# Altium PCB Tien.PcbDoc
Units mm, origin at the board's own origin, x right, y up, seen from the top; angles counter-clockwise.
Board outline 76.58 x 90.04 mm, 2 copper layers (Top Layer, Bottom Layer); 47 components, 70 nets, 267 pads, 0 vias.
Unrouted connection lines stored in the file: 2.
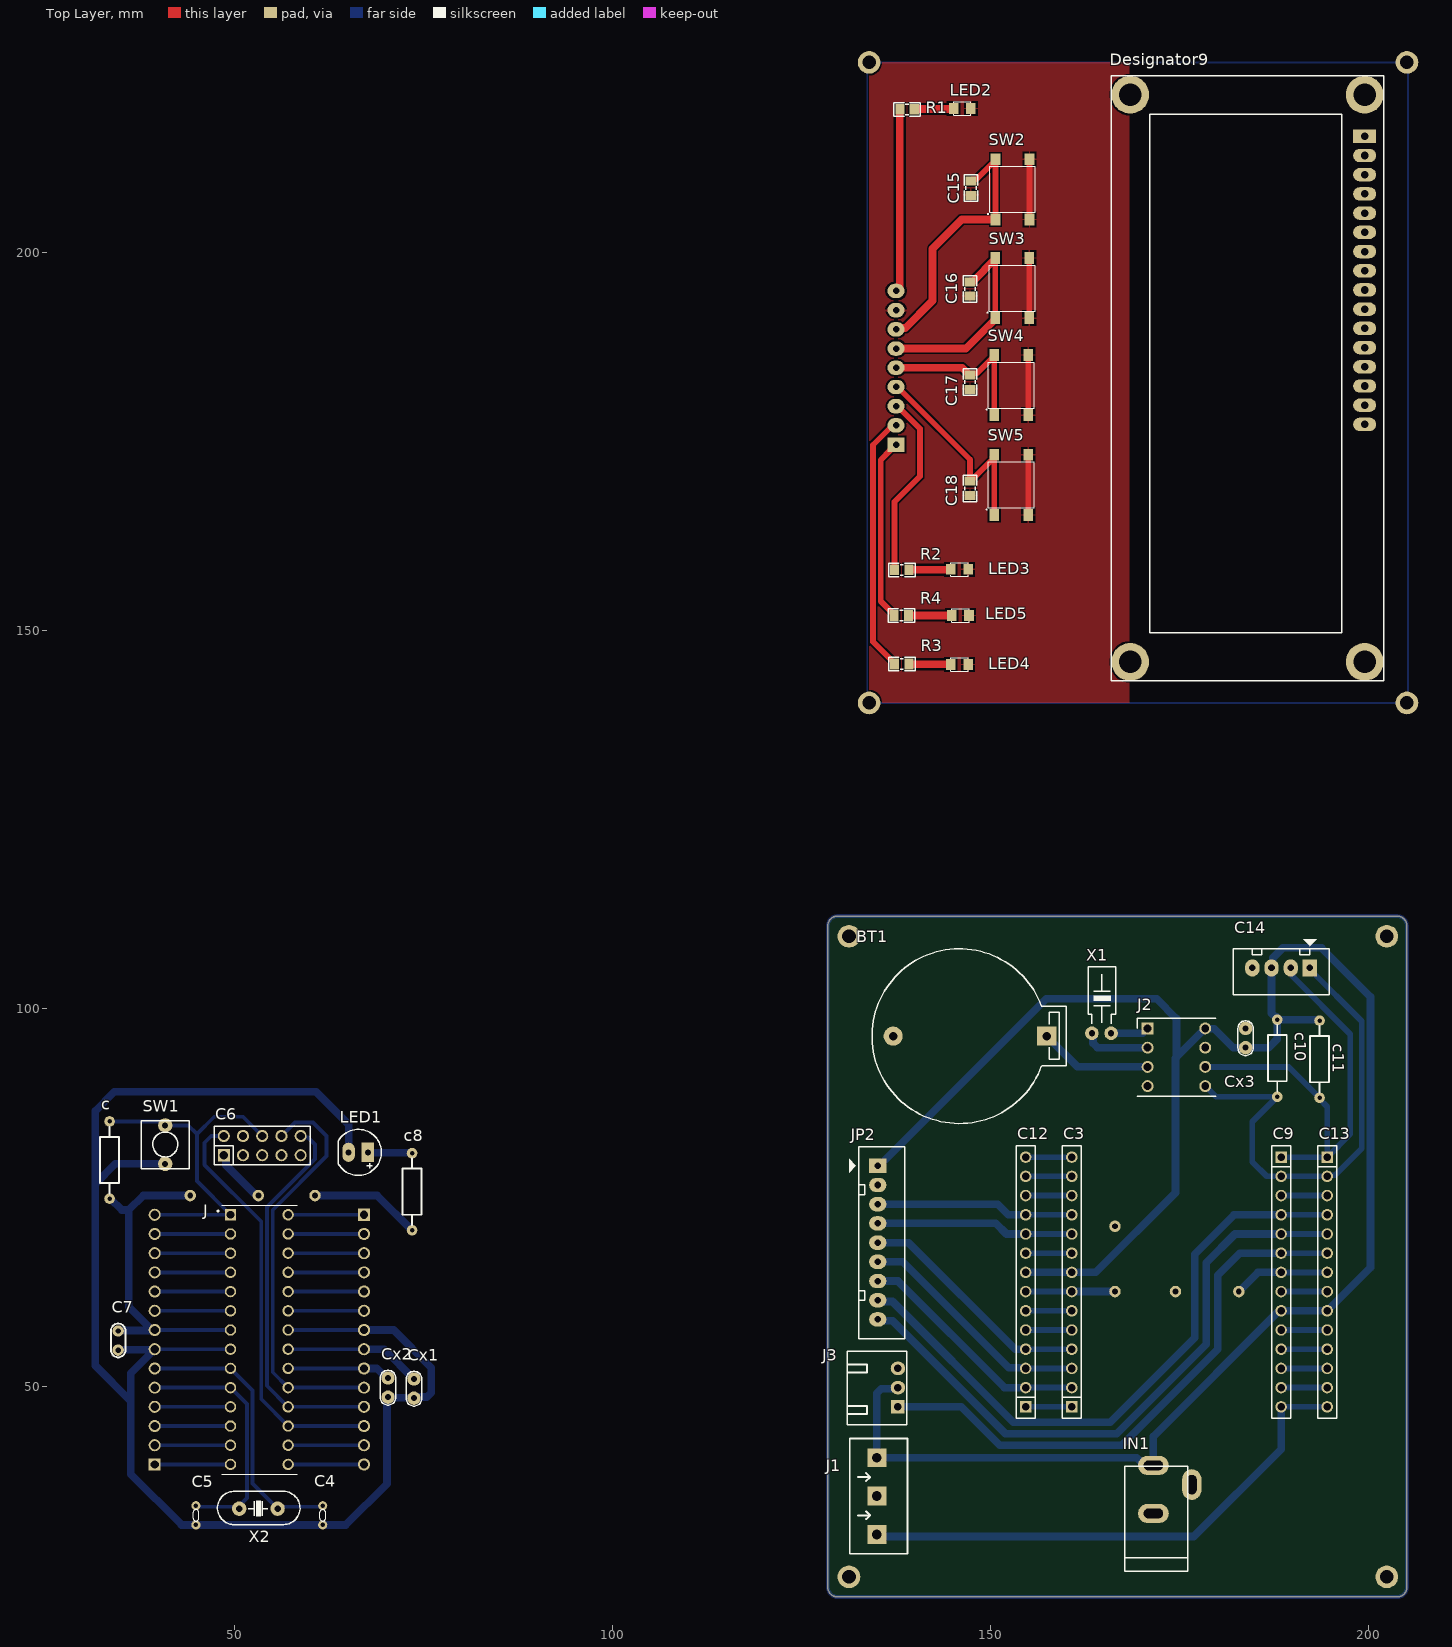
[diagram p0: Top Layer view]
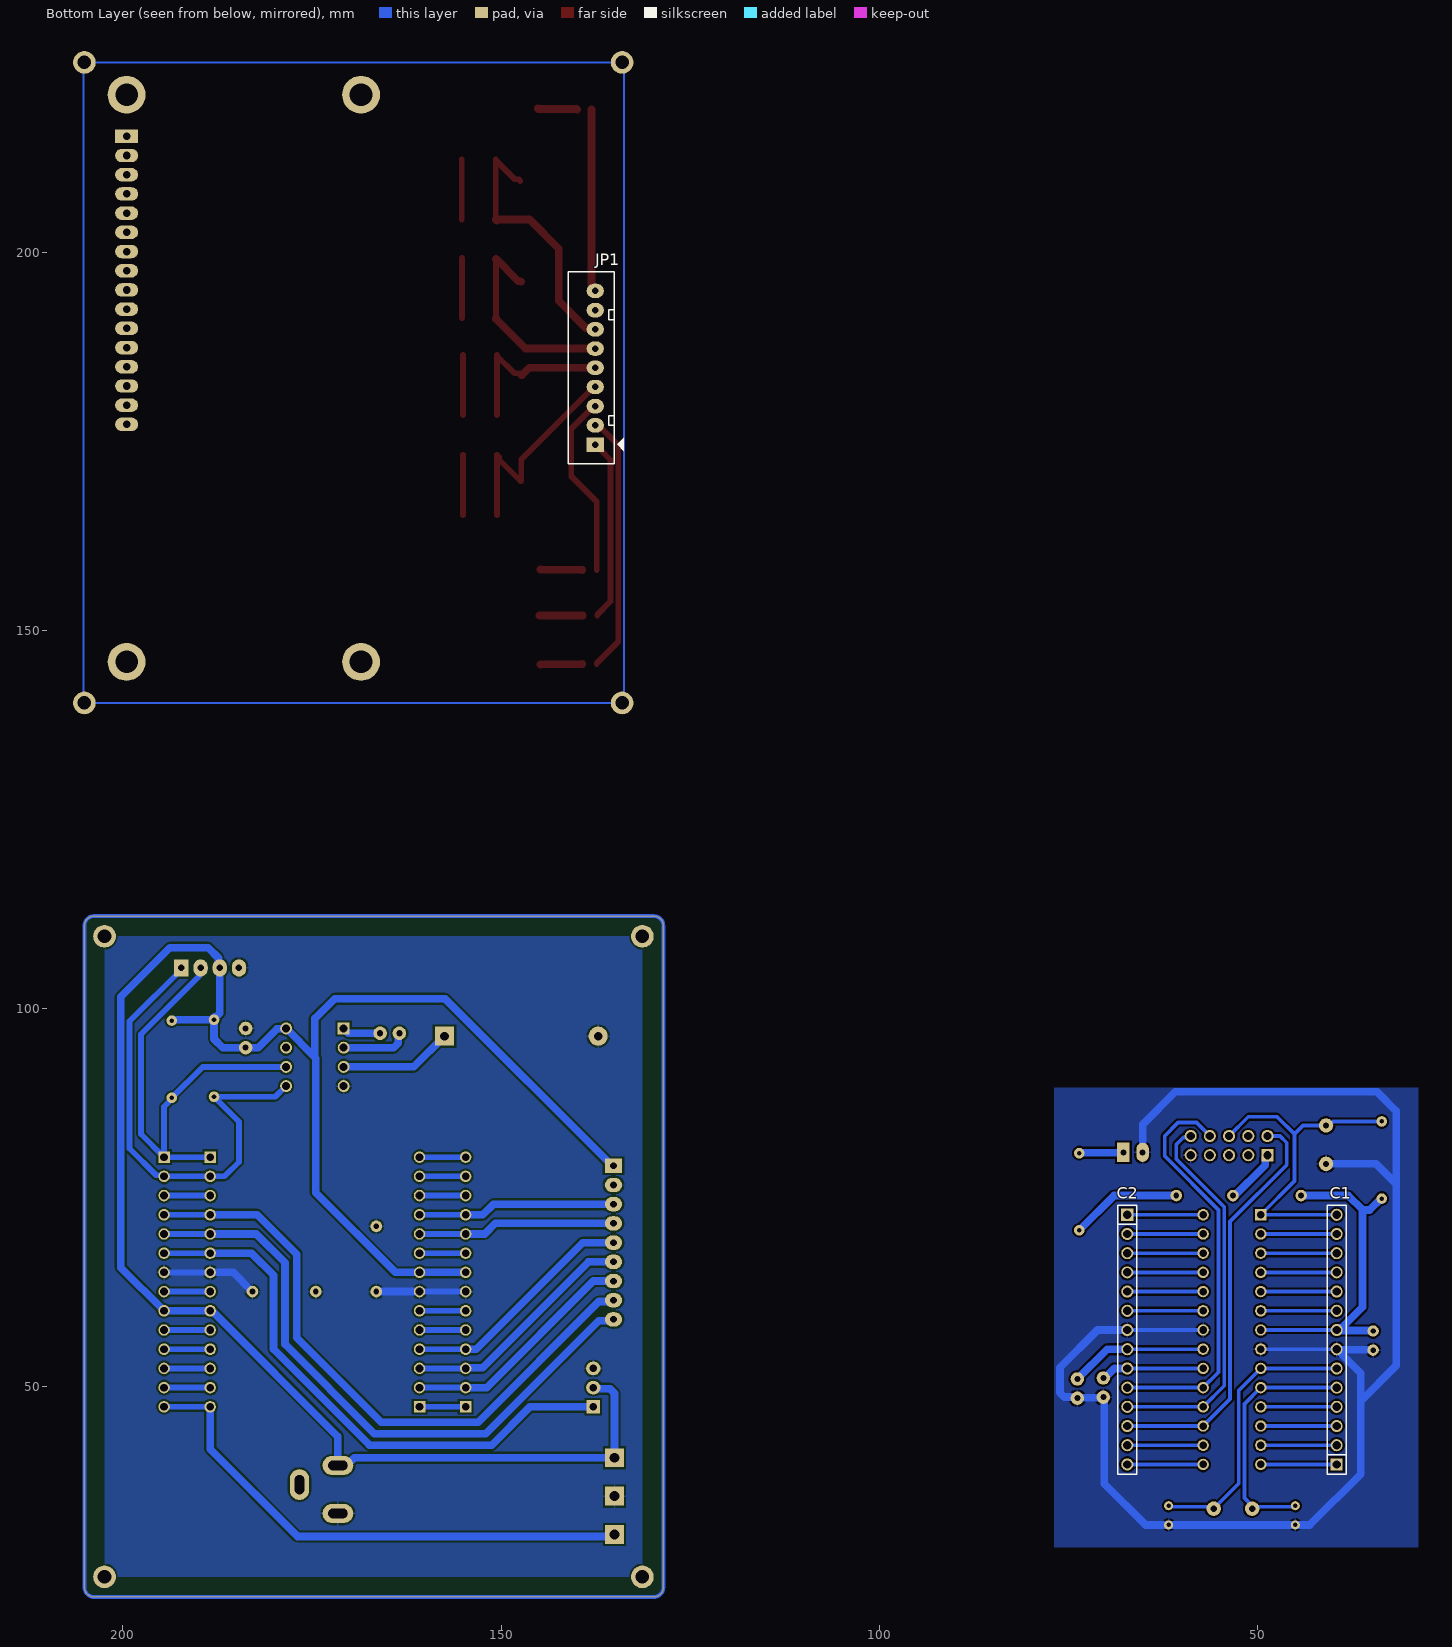
[diagram p1: Bottom Layer view, seen from below]

## Layer stack, top to bottom
Top Solder: solder mask 0.0102, Solder Resist, Dk 3.5
Top Layer: signal copper 0.0356
Dielectric 1: dielectric 0.32, FR-4, Dk 4.8
Bottom Layer: signal copper 0.0356
Bottom Solder: solder mask 0.0102, Solder Resist, Dk 3.5

## Board outline
128.524,23.495 ccw(c129.794,23.495) 129.794,22.225 203.835,22.225 ccw(c203.835,23.495) 205.105,23.495 205.105,110.998 ccw(c203.835,110.998) 203.835,112.268 129.794,112.268 ccw(c129.794,110.998) 128.524,110.998

## Design rules (kind name [scope] priority, off if disabled: settings)
Clearance [All] p1: gap=0.254 ignorepadtopadclearanceinfootprint=FALSE except(0: Arc-Hole Track-Hole SMDPad-Hole THPad-Hole Via-Hole Fill-Hole Poly-Hole Region-Hole Text-Hole)
PolygonConnect [All] p1: connectstyle=Relief reliefconductorwidth=0.254 reliefentries=4 polygonreliefangle="90 Angle" airgapwidth=0.254
RoutingVias [All] p1: holewidth=0.711 width=1.27 viastyle="Through Hole" minholewidth=0.711 minwidth=1.27 maxholewidth=0.711 maxwidth=1.27
SolderMaskExpansion [All] p1: expansion=0.102 istentingtop=FALSE
Width [All] p1: maxlimit=1.016 minlimit=0.508 preferedwidth=0.762 minimp=50.000000 maximp=50.000000 favimp=50.000000
30 further rules are at their usual default settings.

## Components (designator, comment, footprint, x,y, rotation, side; value= is the part's Value field where it differs from the comment)
BT1 "PIN 3V" PIN3V 157.48,96.393 r180 top
c "100K" "tro vach 1/4w" 33.528,80.01 r270 top
C1 "JP14" JP14-D1T 39.497,39.751 r90 bottom
C2 "JP14" JP14-D1T 67.183,72.771 r270 bottom
C3 "JP14" JP14-C1T 160.782,47.371 r90 top
C4 "MH" Tu-pico 61.722,34.29 r270 top value=33p
C5 "MH" Tu-pico 44.958,34.29 r270 top value=33p
C6 "JP5x2" JP5-D2T 53.721,81.915 r0 top
C7 "104" "tu gom" 34.671,56.134 r270 top
c8 "1K" "tro vach 1/4w" 73.533,75.819 r270 top
C9 "JP14" JP14-C1T 188.468,80.391 r270 top
c10 "4,7K" "tro vach 1/4w" 187.96,93.472 r90 top
c11 "4,7K" "tro vach 1/4w" 193.548,93.345 r90 top
C12 "JP14" JP14-C1T 154.686,47.371 r90 top
C13 "JP14" JP14-C1T 194.564,80.391 r270 top
C14 "Header4" Header4 192.278,105.41 r180 top
C15 "106" "Tu 0805" 147.447,208.534 r90 top
C16 "106" "Tu 0805" 147.32,195.199 r90 top
C17 "106" "Tu 0805" 147.32,182.88 r90 top
C18 "106" "Tu 0805" 147.317,168.84 r90 top
Cx1 "104" CN1 73.787,49.784 r270 top value=33pF
Cx2 "104" CN1 70.358,49.911 r270 top value=33pF
Cx3 "104" CN1 183.769,96.139 r270 top value=33pF
Designator9 "Comment" LCD16X2 199.517,215.392 r270 top
IN1 "Jac DC" DC0 174.117,36.449 r90 top
J "1-2199298-9" DIP762W60P254L3556H510Q28 53.34,56.261 r0 top
J1 "KF3" KF3-5.08 135.001,40.64 r270 top
J2 "A_08-LC-TT" DIPS762W61P254L1016H525Q8N 170.815,97.409 r0 top
J3 "sensor header" "Header_Duc Cong_3P 2.54" 137.795,47.371 r270 top
JP1 "JP9" Header9 137.541,174.625 r90 bottom value="Connector 9"
JP2 "JP9" Header9 135.128,79.248 r270 top value="Connector 9"
LED1 "LED" LED-5-RED 67.691,81.026 r180 top value="LED 3 ly Single Colour"
LED2 "LED" LED-0805-Red 145.161,219.075 r0 top value="LED 3 - 5 ly 2 Colour"
LED3 "LED" LED-0805-Red 144.78,158.115 r0 top value="LED 3 - 5 ly 2 Colour"
LED4 "LED" LED-0805-Red 144.78,145.542 r0 top value="LED 3 - 5 ly 2 Colour"
LED5 "LED" LED-0805-Red 144.907,152.019 r0 top value="LED 3 - 5 ly 2 Colour"
R1 "330R" "Tro SMD 0805" 139.003,218.887 r180 top
R2 "330R" "Tro SMD 0805" 138.303,157.988 r180 top
R3 "330R" "Tro SMD 0805" 138.303,145.542 r180 top
R4 "330R" "Tro SMD 0805" 138.246,151.958 r180 top
SW1 "" SW2 40.894,84.582 r270 top
SW2 "SW" SW2-SMD 152.944,208.369 r90 top value="Button chip 4 pin"
SW3 "SW" SW2-SMD 152.908,195.326 r90 top value="Button chip 4 pin"
SW4 "SW" SW2-SMD 152.781,182.499 r90 top value="Button chip 4 pin"
SW5 "SW" SW2-SMD 152.781,169.291 r90 top value="Button chip 4 pin"
X1 "32k" XT32k 163.449,96.774 r90 top value=4Mhz
X2 "16Mhz" XT2 53.213,33.909 r0 top value=4Mhz

## Footprints (in the part's own frame and the unit in brackets; to place one, negate y for a bottom-side part, rotate by r counter-clockwise, add the part's x,y. Pads: shape width x height; smd on the part's side, far side on the other; paste and mask are expansions set on the pad)
CN1 [mil]
  round 70 hole 31: 1(-50,0) 2(50,0)
  silkscreen extent -90,-40 91,40, body extent -115,-33 115,33, height 265
DC0 [mil] "Jac DC input"
  oval 100x160 hole 50 slot 100 at 90 deg: 1(125,100) 2(-125,100)
  oval 160x100 hole 50 slot 100 at 0 deg: 3(25,-100)
  silkscreen extent -425,-80 120,250, body extent -410,-105 134,269, height 434
DIP762W60P254L3556H510Q28 [mm]
  rect 1.508x1.508 hole 1: 1(-3.81,16.51)
  round 1.508 hole 1: 2(-3.81,13.97) 3(-3.81,11.43) 4(-3.81,8.89) 5(-3.81,6.35) 6(-3.81,3.81) 7(-3.81,1.27) 8(-3.81,-1.27) 9(-3.81,-3.81) 10(-3.81,-6.35) 11(-3.81,-8.89) 12(-3.81,-11.43) 13(-3.81,-13.97) 14(-3.81,-16.51) 15(3.81,-16.51) 16(3.81,-13.97) 17(3.81,-11.43) 18(3.81,-8.89) 19(3.81,-6.35) 20(3.81,-3.81) 21(3.81,-1.27) 22(3.81,1.27) 23(3.81,3.81) 24(3.81,6.35) 25(3.81,8.89) 26(3.81,11.43) 27(3.81,13.97) 28(3.81,16.51)
  silkscreen extent -5.55,-17.78 5,17.78, body extent -4.87,-17.78 5.13,17.78, height 5
DIPS762W61P254L1016H525Q8N [mm]
  rect 1.575x1.575 hole 1.05: 1(0,0)
  round 1.575 hole 1.05: 2(0,-2.54) 3(0,-5.08) 4(0,-7.62) 5(7.62,-7.62) 6(7.62,-5.08) 7(7.62,-2.54) 8(7.62,0)
  silkscreen extent -1.37,-8.99 8.99,1.37, body extent -1.27,-8.76 8.89,1.4, height 4.81
Header4 [mil] "CON4"
  rect 75x90 hole 34: 1(0,0)
  oval 75x90 hole 34: 2(100,0) 3(200,0) 4(300,0)
  silkscreen extent -100,-150 400,140, body extent -90,-90 398,136, height 276
Header9 [mil] "CON9"
  rect 75x90 hole 34: 1(0,0)
  oval 75x90 hole 34: 2(100,0) 3(200,0) 4(300,0) 5(400,0) 6(500,0) 7(600,0) 8(700,0) 9(800,0)
  silkscreen extent -100,-150 900,140
"Header_Duc Cong_3P 2.54" [mil]
  rect 70x70 hole 39.37 unplated: 1(0,0)
  oval 70x75 hole 39.37 unplated: 2(-100,0) 3(-200,0)
  silkscreen extent -290,-265 93,47
JP5-D2T [mm] "10 pins, dual pin, straight, gold plating"
  rect 1.6x1.6 hole 1.1: 1(-5.08,-1.27)
  round 1.6 hole 1.1: 2(-2.54,-1.27) 3(0,-1.27) 4(2.54,-1.27) 5(5.08,-1.27) 6(5.08,1.27) 7(2.54,1.27) 8(0,1.27) 9(-2.54,1.27) 10(-5.08,1.27)
  silkscreen extent -6.35,-2.54 6.35,2.54, body extent -6.35,-2.54 6.35,2.54, height 8.55
JP14-C1T [mm] "14 row, straight, gold plating"
  rect 1.52x1.52 hole 1.02: 1(0,0)
  round 1.52 hole 1.02: 2(2.54,0) 3(5.08,0) 4(7.62,0) 5(10.16,0) 6(12.7,0) 7(15.24,0) 8(17.78,0) 9(20.32,0) 10(22.86,0) 11(25.4,0) 12(27.94,0) 13(30.48,0) 14(33.02,0)
  silkscreen extent -1.52,-1.27 34.54,1.27, body extent -1.52,-1.25 34.54,1.25, height 8.51
JP14-D1T [mm] "14 pins, 1 row, straight, gold plating"
  rect 1.6x1.6 hole 1.1: 1(0,0)
  round 1.6 hole 1.1: 2(2.54,0) 3(5.08,0) 4(7.62,0) 5(10.16,0) 6(12.7,0) 7(15.24,0) 8(17.78,0) 9(20.32,0) 10(22.86,0) 11(25.4,0) 12(27.94,0) 13(30.48,0) 14(33.02,0)
  silkscreen extent -1.27,-1.27 34.29,1.27, body extent -1.27,-1.27 34.29,1.27, height 8.54
KF3-5.08 [mm]
  rect 2.5x2.5 hole 1.3: 1(0,0) 2(5.08,0) 3(10.147,0)
  silkscreen extent -2.54,-3.58 12.7,4.06, body extent -2.42,-3.51 12.58,3.99, height 10
LCD16X2 [mm] "LCD dipslay 16x2, 16 pin"
  round 5 hole 3: 1(-5.5,0) 1(-5.5,-31) 1(69.5,-31) 1(69.5,0)
  rect 1.778x3.048 hole 1: 1(0,0)
  oval 1.778x3.048 hole 1: 2(2.54,0) 3(5.08,0) 4(7.62,0) 5(10.16,0) 6(12.7,0) 7(15.24,0) 8(17.78,0) 9(20.32,0) 10(22.86,0) 11(25.4,0) 12(27.94,0) 13(30.48,0) 14(33.02,0) 15(35.56,0) 16(38.1,0)
  round 0 all layers, no hole: ""(-5.5,0)
  silkscreen extent -8,-33.5 72,2.5, body extent -7.87,-33.96 72.64,2.54, height 18.14
LED-5-RED [mil] "LED 2 PIN, 5 ly , Only colour,pin to pin 100mil"
  rect 65x100 hole 32: 1(0,0)
  oval 65x100 hole 32: 2(100,0)
  silkscreen extent -70,-120 154,120, body extent -65,-119 149,118, height 339
LED-0805-Red [mil]
  rect 50x55 smd: 1(0,0) 2(90,0)
  silkscreen extent 0,-35 90,35, body extent 5,-25 85,25, height 43
PIN3V [mil] "Socket PIN 3V"
  rect 100x100 hole 45: 1(0,0)
  round 100 hole 45: 2(800,0)
  silkscreen extent -100,-455 910,455, body extent -128,-447 1002,449, height 278
SW2 [mil] "SW button 2pin, 250x 250 mil"
  round 75 hole 31: 1(0,0) 2(200,0)
  silkscreen extent -25,-125 225,125
SW2-SMD [mm] "6*6mm vertical type, SMD, height 5.0mm, black actuator, 160gf, T&R"
  rect 1.55x1.3 smd: 1(-3.975,2.25) 2(-3.975,-2.25) 3(3.975,-2.25) 4(3.975,2.25)
  silkscreen extent -3.29,-3.04 3.04,3.29, body extent -4.5,-3.1 4.5,3.1, height 4.99
"Tro SMD 0805" [mm]
  rect 1.2x1.4 smd: 1(-0.946,-0.061) 2(0.954,-0.061)
  silkscreen extent -1.75,-0.97 1.75,0.84, body extent -1.56,-0.76 1.44,0.64, height 0.53
"tro vach 1/4w" [mm]
  round 1.4 hole 0.6: 1(-5.1,0) 2(5.1,0)
  silkscreen extent -4.39,-1.25 4.42,1.25, body extent -5.38,-1.2 5.38,1.2, height 2.41
"Tu 0805" [mm] "Compoment SMD 80x50mil"
  rect 1.2x1.4 smd: 1(-0.946,-0.003) 2(0.954,-0.003)
  silkscreen extent -1.75,-0.89 1.75,0.89, body extent -1.01,-0.64 1.01,0.63, height 0.61
"tu gom" [mm] "Tu gom mini"
  round 1.5 hole 0.7: 1(-1.27,0) 2(1.27,0)
  silkscreen extent -2.25,-0.97 2.22,0.97, body extent -2.92,-0.85 2.92,0.85, height 6.12
Tu-pico [mm] "Tu gom mini"
  round 1.2 hole 0.6: 1(0,0) 2(2.54,0)
  silkscreen extent 0.51,-0.38 2.03,0.38, body extent -1.65,-0.85 4.19,0.85, height 6.12
XT2 [mil] "Footpin for Crystal 2 pin"
  round 75 hole 34: 1(-100,0) 2(100,0)
  silkscreen extent -213,-83 217,90, body extent -216,-87 216,90, height 144
XT32k [mm]
  round 1.8 hole 0.813: 1(0,0) 2(0,-2.54)
  silkscreen extent 1.27,-3.17 8.76,0.51, body extent -0.15,-2.42 8.2,-0.12, height 1.95

## Part data
BT1: "Battery 3VDC"
c c8 c10 c11: library part "Tro Vach 1/4W 5% 10k", "Căm", Chung_Loai=Cắm, Don_Vi=Con, Ma_Hang=MH007354, So_Chan=2, Ten_Linh_Kien="Trở Vạch 1/4w 5% 10K"
C1 C2 C3 C9 C12 C13: "WR-PHD 2.54 mm Angled Socket Header", Manufacturer="W¨¹rth Elektronik eiSos GmbH", partNo=613014143121, ComponentLink1 Description=Manufacturer, ComponentLink1URL=http://www.we-online.com, ComponentLink2 Description=Datasheet, ComponentLink2URL=http://katalog.we-online.de/em/datasheet/6130xx143121.pdf, Created by="Karrer Zheng", Created Date="29 March 2013", NoPins=14
C4 C5: library part "Tu 33pF", "Cắm"
C6: "WR-PHD 2.54 mm Dual Socket Header", Manufacturer="W¨¹rth Elektronik eiSos GmbH", partNo=61301021821, ComponentLink1 Description=Manufacturer, ComponentLink1URL=http://www.we-online.com, ComponentLink2 Description=Datasheet, ComponentLink2URL=http://katalog.we-online.de/em/datasheet/6130xx21821.pdf, Created by="Karrer Zheng", Created Date="29 March 2013", NoPins=10
C7: library part "Tu gom 104 50V", "Cắm", Chung_Loai=Cắm, Don_Vi=Con, Ma_Hang=MH004761, So_Chan=2, Ten_Linh_Kien="Tụ gốm 104 100nF 50V"
C14: "Header IDC, 4 x 1 Pin Vertical 2.54mm Pitch (Non-Boxed, Male)", Manufacturer="W¨¹rth Elektronik eiSos GmbH", partNo=613002143121, ComponentLink1 Description=Manufacturer, ComponentLink1URL=http://www.we-online.com, ComponentLink2 Description=Datasheet, ComponentLink2URL=http://katalog.we-online.de/em/datasheet/6130xx143121.pdf, Created by="Karrer Zheng", Created Date="29 March 2013", NoPins=02
C15 C16 C17 C18: library part "Tu 0805 106 16V 10%", "Dán", Chung_Loai=Dán, Don_Vi=Con, Ma_Hang=MH004553, So_Chan=2, Ten_Linh_Kien="Tụ 0805 106-10uF 10% 16V"
Cx1 Cx2 Cx3: library part CN0, "Cremic For Xtal 1pF => 100pF"
IN1: library part DCIN, "Jac DC input"
J: "28P,DIP SKT,300 CL,LDR,PB FREE", Package="PDIP-28 TE Connectivity", Centerline_Pitch="2.54 mm[.1 in]", ComponentLink1Description="New link", Digi-Key_Part_Number=A120353-ND, EU_RoHS_Compliance=Compliant, MF="TE Connectivity", MP=1-2199298-9, Number_of_Positions=28, Product_Type=Socket, SnapEDA_Link=https://www.snapeda.com/parts/1-2199298-9/TE%20Connectivity%20AMP%20Connectors/view-part/1265789/?ref=snap
J1: Manufacturer="Würth Elektronik eiSos GmbH", partNo=691103110003, ComponentLink1 Description=Manufacturer, ComponentLink1URL=http://www.we-online.com, ComponentLink2 Description=Datasheet, ComponentLink2URL=http://katalog.we-online.de/em/datasheet/6911031100xx.pdf, Created by="Karrer Zheng", Created Date="29 October 2013", NoPins=3
J2: "8 (2 x 4) Pos DIP, 0.3 (7.62mm) Row Spacing Socket Tin Through Hole", Package=None, Availability=Unavailable, MF="Assmann WSW Components", MP="A 08-LC-TT", Price=None, SnapEDA_Link=https://www.snapeda.com/parts/A%2008-LC-TT/Assmann%20WSW%20Components/view-part/3092960/?ref=snap
J3: library part "Header 1_2.54_3P", "Cắm", Chung_Loai=Cắm
JP1 JP2: library part Header9, "Connector 9"
LED1: "LED Single colour Green and Red"
LED2 LED3 LED4 LED5: library part "LED SMD"
R1 R2 R3 R4: library part "Tro 0805 5% 330R", "Dán", Chung_Loai=Dán, Don_Vi=Con, Ma_Hang=MH005337, So_Chan=2, Ten_Linh_Kien="Trở 0805 5% 330R"
SW1: library part "Nut Nhan 2 Chan ( Dip )", "Cắm", Chung_Loai=Cắm, Don_Vi=Con, Ma_Hang=MH001959, Ten_Linh_Kien="Nút Nhấn 2 Chân 6x6x5MM DIP"
SW2 SW3 SW4 SW5: library part SW4, "Switch button 4 pin"
X1 X2: library part XT2, "Crystal, 32.768 KHz, -40 to 85 degC, 3.2 x 1.5 x 0.9 mm SMD"

## Free pads (board coordinates)
  round 1.524 hole 0.762: 4(44.196,75.311) 5(53.213,75.311) 5(60.706,75.311) 8(166.497,71.247) 9(166.497,62.611) 9(174.498,62.611) 9(182.88,62.611)
  round 3 hole 1.8: 14(131.318,24.892) 14(131.318,109.601) 14(133.985,140.462) 14(133.985,225.171) 14(202.438,24.892) 14(202.438,109.601) 14(205.105,140.462) 14(205.105,225.171)

## Nets (pads, with @x,y where several pads share a name; then routed paths per layer and width w, separated by ;. In a path a pad name is that pad's centre, name@x,y a point inside that pad or via, vN(x,y) a via of type N, cw(c..) or ccw(c..) an arc to the next point about the centre after c; other vN are vias at no path point)
NetBT1_1: BT1.1 J2.3 | length 15
  Bottom Layer w1.016: BT1.1 161.544,92.329 J2.3
NetBT1_2: BT1.2 C3.7 C9.7 C12.7 C13.7 C14.4 Cx3.1 IN1.2 J1.2 J2.4 J3.3 JP2.2 pad.8 pad.9 | length 24.5
  Bottom Layer w0.762: C12.7 C3.7 ; C9.7 C13.7
  Bottom Layer w1.016: C3.7 pad.9@166.497,62.611 ; pad.9@182.88,62.611 185.42,65.151 C9.7
NetC1_1: C1.1 J.14 | length 10
  Bottom Layer w0.508: C1.1 J.14
NetC1_2: C1.2 J.13 | length 10
  Bottom Layer w0.508: C1.2 J.13
NetC1_3: C1.3 J.12 | length 10
  Bottom Layer w0.508: C1.3 J.12
NetC1_4: C1.4 J.11 | length 10
  Bottom Layer w0.508: C1.4 J.11
NetC1_5: C1.5 C5.1 J.10 X2.1 | length 33.2
  Bottom Layer w0.508: C1.5 J.10 51.689,47.752 51.689,35.303 50.673,34.287 X2.1 50.424,34.158 45.09,34.158 C5.1
NetC1_6: C1.6 C4.1 J.9 X2.2 | length 37.3
  Bottom Layer w0.508: C1.6 J.9 52.451,49.53 52.451,37.211 X2.2 56.002,34.158 61.59,34.158 C4.1
NetC1_7: C1.7 C2.7 C4.2 C5.2 C6.5 C7.2 Cx1.2 Cx2.2 J.8 J.22 LED1.2 SW1.2 | length 204.2
  Bottom Layer w0.508: C1.7 J.8 ; J.22 C2.7
  Bottom Layer w1.016: C7.2 34.734,54.927 C1.7@39.433,54.927 ; C1.7 C1.7@39.433,54.927 ; SW1.2 34.29,79.502 31.623,76.835 ; LED1.2 65.151,84.709 60.833,89.027 34.163,89.027 31.623,86.487 31.623,76.835 ; C2.7 71.12,57.531 76.092,52.559 76.092,49.255 75.497,48.66 73.933,48.66 Cx1.2 73.724,48.578 70.421,48.578 Cx2.2 70.231,48.514 70.231,37.211 64.77,31.75 C4.2 C5.2 43.053,31.75 36.322,38.481 36.322,48.133 ; 31.623,76.835 31.623,52.832 36.322,48.133 ; 36.322,48.133 36.322,51.816 C1.7@39.433,54.927
NetC1_8: C1.8 C6.1 C7.1 c8.2 c.2 J.7 pad.4 pad.5 | length 67
  Bottom Layer w0.508: C1.8 J.7
  Bottom Layer w1.016: c.2 33.632,74.91 35.136,73.406 36.068,73.406 ; C7.1 34.734,57.468 39.433,57.468 C1.8 39.339,57.531 39.047,57.823 38.824,57.823 36.068,60.579 36.068,73.406 ; pad.4 37.973,75.311 36.068,73.406 ; C6.1 48.933,80.353 48.933,79.337 53.213,75.057 pad.5@53.213,75.311 ; pad.5@60.706,75.311 68.941,75.311 c8.2
NetC1_9: C1.9 J.6 | length 10
  Bottom Layer w0.508: C1.9 J.6
NetC1_10: C1.10 J.5 | length 10
  Bottom Layer w0.508: C1.10 J.5
NetC1_11: C1.11 J.4 | length 10
  Bottom Layer w0.508: C1.11 J.4
NetC1_12: C1.12 J.3 | length 10
  Bottom Layer w0.508: C1.12 J.3
NetC1_13: C1.13 J.2 | length 10
  Bottom Layer w0.508: C1.13 J.2
NetC1_14: C1.14 C6.8 c.1 J.1 SW1.1 | length 45.4
  Bottom Layer w0.508: c.1 39.988,85.11 40.516,84.582 SW1.1 43.942,84.582 45.085,83.439 ; C1.14 J.1 45.085,77.216 45.085,83.439 ; C6.8 51.181,85.725 47.371,85.725 45.085,83.439
NetC2_1: C2.1 J.28 | length 10
  Bottom Layer w0.508: J.28 C2.1
NetC2_2: C2.2 J.27 | length 10
  Bottom Layer w0.508: J.27 C2.2
NetC2_3: C2.3 J.26 | length 10
  Bottom Layer w0.508: J.26 C2.3
NetC2_4: C2.4 J.25 | length 10
  Bottom Layer w0.508: J.25 C2.4
NetC2_5: C2.5 J.24 | length 10
  Bottom Layer w0.508: J.24 C2.5
NetC2_6: C2.6 J.23 | length 10
  Bottom Layer w0.508: J.23 C2.6
NetC2_8: C2.8 Cx1.1 J.21 | length 18.3
  Bottom Layer w0.508: J.21 C2.8
  Bottom Layer w1.016: C2.8 69.85,54.991 Cx1.1
NetC2_9: C2.9 Cx2.1 J.20 | length 13.7
  Bottom Layer w0.508: J.20 C2.9 ; Cx2.1@70.145,51.181 Cx2.1
  Bottom Layer w1.016: C2.9 68.875,52.451 Cx2.1@70.145,51.181
NetC2_10: C2.10 C6.7 J.19 | length 54.5
  Bottom Layer w0.508: C6.7 58.039,84.963 60.452,84.963 62.23,83.185 62.23,80.518 55.118,73.406 55.118,51.943 J.19 C2.10
NetC2_11: C2.11 C6.6 J.18 | length 50.9
  Bottom Layer w0.508: C6.6 59.01,82.976 59.782,82.976 60.706,82.052 60.706,80.137 54.356,73.787 54.356,50.165 J.18 C2.11
NetC2_12: C2.12 C6.10 J.17 | length 55
  Bottom Layer w0.508: C6.10 46.99,83.185 46.101,82.296 46.101,79.375 53.594,71.882 53.594,48.387 J.17 C2.12
NetC2_13: C2.13 J.16 | length 10
  Bottom Layer w0.508: J.16 C2.13
NetC2_14: C2.14 J.15 | length 10
  Bottom Layer w0.508: J.15 C2.14
NetC3_1: C3.1 C12.1 | length 6.1
  Bottom Layer w0.762: C12.1 C3.1
NetC3_2: C3.2 C12.2 JP2.7 | length 31.5
  Bottom Layer w0.762: C12.2 C3.2
  Bottom Layer w1.016: JP2.7 137.795,64.008 151.892,49.911 C12.2
NetC3_3: C3.3 C12.3 JP2.6 | length 31.5
  Bottom Layer w0.762: C12.3 C3.3
  Bottom Layer w1.016: JP2.6 138.43,66.548 152.431,52.547 154.59,52.547 C12.3
NetC3_4: C3.4 C12.4 JP2.5 | length 31.5
  Bottom Layer w0.762: C12.4 C3.4
  Bottom Layer w1.016: JP2.5 139.192,69.088 153.289,54.991 C12.4
NetC3_5: C3.5 C12.5 | length 6.1
  Bottom Layer w0.762: C12.5 C3.5
NetC3_6: C3.6 C12.6 | length 6.1
  Bottom Layer w0.762: C12.6 C3.6
NetC3_8: C3.8 C9.9 c10.2 c11.2 C12.8 C13.9 C14.3 Cx3.2 IN1.1 J1.1 J2.8 J3.2 JP2.1 | length 273.7
  Bottom Layer w1.016: JP2.1 135.319,79.248 157.416,101.346 171.998,101.346 174.625,98.719 174.625,93.599 ; J1.1@135.509,40.132 J1.1 ; J3.2 137.649,49.765 135.596,49.765 135.001,49.17 J1.1 ; C12.8 C3.8 163.957,65.151 174.498,75.692 174.498,93.472 174.625,93.599 ; c10.2@187.833,98.971 187.887,98.917 c10.2@187.887,98.749 ; c11.2 193.444,98.445 193.317,98.572 c10.2 ; J1.1 169.387,40.64 170.403,39.624 IN1.1 171.577,43.438 188.113,59.975 188.372,59.975 C9.9 C13.9 200.279,65.786 200.279,101.6 193.802,108.077 188.722,108.077 187.368,106.723 187.368,105.58 C14.3 187.198,99.438 c10.2@187.887,98.749 ; 174.625,93.599 J2.8 178.482,97.362 179.625,97.362 182.118,94.869 Cx3.2 186.817,94.869 187.96,96.012 c10.2 ; c10.2@187.887,98.749 187.96,98.676 c10.2 ; c10.2@187.887,98.749 187.887,98.645 c10.2
NetC3_9: C3.9 C12.9 | length 6.1
  Bottom Layer w0.762: C12.9 C3.9
NetC3_10: C3.10 C12.10 JP2.4 | length 26.2
  Bottom Layer w0.762: C12.10 C3.10
  Bottom Layer w1.016: JP2.4 150.749,71.628 152.146,70.231 C12.10
NetC3_11: C3.11 C12.11 JP2.3 | length 26.2
  Bottom Layer w0.762: C12.11 C3.11
  Bottom Layer w1.016: JP2.3 151.003,74.168 152.4,72.771 C12.11
NetC3_12: C3.12 C12.12 | length 6.1
  Bottom Layer w0.762: C12.12 C3.12
NetC3_13: C3.13 C12.13 | length 6.1
  Bottom Layer w0.762: C12.13 C3.13
NetC3_14: C3.14 C12.14 | length 6.1
  Bottom Layer w0.762: C12.14 C3.14
Netc8_1: c8.1 LED1.1 | length 5.9
  Bottom Layer w1.016: LED1.1 67.745,80.972 73.479,80.972 c8.1
NetC9_1: C9.1 c11.1 C13.1 C14.2 J2.6 | length 60.7
  Bottom Layer w0.762: J2.6 189.464,92.329 c11.1 193.548,88.072 194.564,87.056 C13.1 ; C9.1 C13.1 ; C14.2 189.957,105.191 189.957,104.302 197.612,96.647 197.612,83.439 C13.1
NetC9_2: C9.2 c10.1 C13.2 C14.1 J2.5 | length 63.6
  Bottom Layer w0.762: J2.5 179.852,88.372 c10.1 184.658,85.07 184.658,79.756 186.563,77.851 C9.2 C13.2 194.703,77.99 195.592,77.99 199.136,81.534 199.136,98.361 192.278,105.219 C14.1
NetC9_3: C9.3 C13.3 | length 6.1
  Bottom Layer w0.762: C9.3 C13.3
NetC9_4: C9.4 C13.4 JP2.8 | length 84.1
  Bottom Layer w0.762: C9.4 C13.4
  Bottom Layer w1.016: JP2.8 135.255,61.595 135.552,61.298 137.076,61.298 153.035,45.339 165.862,45.339 177.038,56.515 177.038,67.564 182.245,72.771 C9.4
NetC9_5: C9.5 C13.5 JP2.9 | length 83
  Bottom Layer w0.762: C9.5 C13.5
  Bottom Layer w1.016: JP2.9 135.298,58.758 137.076,58.758 152.019,43.815 166.751,43.815 178.562,55.626 178.562,66.421 182.372,70.231 C9.5
NetC9_6: C9.6 C13.6 J3.1 | length 75.1
  Bottom Layer w0.762: C9.6 C13.6
  Bottom Layer w1.016: J3.1 146.177,47.371 151.257,42.291 167.386,42.291 180.086,54.991 180.086,64.77 183.007,67.691 C9.6
NetC9_8: C9.8 C13.8 | length 6.1
  Bottom Layer w0.762: C9.8 C13.8
NetC9_10: C9.10 C13.10 | length 6.1
  Bottom Layer w0.762: C9.10 C13.10
NetC9_11: C9.11 C13.11 | length 6.1
  Bottom Layer w0.762: C9.11 C13.11
NetC9_12: C9.12 C13.12 | length 6.1
  Bottom Layer w0.762: C9.12 C13.12
NetC9_13: C9.13 C13.13 | length 6.1
  Bottom Layer w0.762: C9.13 C13.13
NetC9_14: C9.14 C13.14 J1.3 | length 70
  Bottom Layer w0.762: C9.14 C13.14
  Bottom Layer w1.016: J1.3 135.268,30.226 176.911,30.226 188.468,41.783 C9.14
NetC15_1: C15.1 C16.1 C17.1 C18.1 JP1.8 LED2.2 LED3.2 LED4.2 LED5.2 SW2.2 SW2.3 SW3.2 SW3.3 SW4.2 SW4.3 SW5.2 SW5.3 | length 31.8
  Top Layer w0.762: SW5.2 SW5.3 ; SW4.2 SW4.3 ; SW3.2 SW3.3 ; SW2.2 SW2.3
NetC15_2: C15.2 JP1.7 SW2.1 SW2.4 | length 35.7
  Top Layer w0.762: C15.2 147.669,209.707 148.182,209.707 SW2.4@150.694,212.219 ; SW2.1 SW2.4@150.694,212.219 ; SW2.4 SW2.4@150.694,212.219
  Top Layer w1.016: JP1.7 137.711,190.035 138.767,190.035 142.367,193.635 142.367,200.533 146.228,204.394 150.552,204.394 150.552,204.252 SW2.1
NetC16_2: C16.2 JP1.6 SW3.1 SW3.4 | length 27.4
  Top Layer w0.762: SW3.1 150.658,199.176 SW3.4
  Top Layer w1.016: JP1.6 146.757,187.325 150.658,191.226 SW3.1 ; C16.2 147.415,196.245 147.727,196.245 SW3.4@150.658,199.176
NetC17_2: C17.2 JP1.5 SW4.1 SW4.4 | length 22.4
  Top Layer w0.762: C17.2 147.542,184.053 148.235,184.053 SW4.4@150.531,186.349 ; SW4.1 SW4.4@150.531,186.349 ; SW4.4 SW4.4@150.531,186.349
  Top Layer w1.016: JP1.5 146.273,184.785 147.223,183.834 C17.2
NetC18_2: C18.2 JP1.4 SW5.1 SW5.4 | length 29.4
  Top Layer w0.762: JP1.4 137.731,182.245 147.32,172.656 C18.2 147.42,169.794 150.262,172.636 150.262,172.997 SW5.4 SW5.1
NetJ2_1: J2.1 X1.2 | length 5.1
  Bottom Layer w1.016: X1.2 170.18,96.774 J2.1
NetJ2_2: J2.2 X1.1 | length 8.8
  Bottom Layer w1.016: X1.1 163.599,96.624 163.599,95.464 164.194,94.869 J2.2
NetJP1_1: JP1.1 R4.2 | length 24.3
  Top Layer w0.762: R4.2 137.292,152.119 135.509,153.902 135.509,172.593 136.779,173.863 136.779,174.053 137.35,174.625 JP1.1
NetJP1_2: JP1.2 R3.2 | length 34.3
  Top Layer w0.762: R3.2 137.349,145.703 134.493,148.558 134.493,174.571 137.087,177.165 JP1.2
NetJP1_3: JP1.3 R2.2 | length 24.5
  Top Layer w0.762: R2.2 137.349,167.067 140.716,170.434 140.716,176.72 137.731,179.705 JP1.3
NetJP1_9: JP1.9 R1.2 | length 24.2
  Top Layer w1.016: JP1.9 137.541,194.995 138.049,195.503 R1.2
NetLED2_1: LED2.1 R1.1 | length 5.3
  Top Layer w1.016: R1.1 140.012,219.011 145.097,219.011 LED2.1
NetLED3_1: LED3.1 R2.1 | length 5.6
  Top Layer w1.016: R2.1 139.282,158.082 144.747,158.082 LED3.1
NetLED4_1: LED4.1 R3.1 | length 5.6
  Top Layer w1.016: R3.1 139.279,145.572 144.75,145.572 LED4.1
NetLED5_1: LED5.1 R4.1 | length 5.7
  Top Layer w1.016: R4.1 LED5.1
pads on no net: C6.2 C6.3 C6.4 C6.9 Designator9. Designator9.1 Designator9.2 Designator9.3 Designator9.4 Designator9.5 Designator9.6 Designator9.7 Designator9.8 Designator9.9 Designator9.10 Designator9.11 Designator9.12 Designator9.13 Designator9.14 Designator9.15 Designator9.16 IN1.3 J2.7
copper on no net: | length 643.5
  Bottom Layer w0.254: 133.731,140.462 205.232,140.462 205.232,225.171 133.731,225.171 133.731,140.462
  Bottom Layer w0.5: 128.524,23.495 ccw(c129.794,23.495) 129.794,22.225 131.191,22.225 202.565,22.225 203.835,22.225 ccw(c203.835,23.495) 205.105,23.495 205.105,110.998 ccw(c203.835,110.998) 203.835,112.268 131.445,112.268 129.794,112.268 ccw(c129.794,110.998) 128.524,110.998 128.524,23.495

## Polygon pours and split planes (outlines as drawn)
NetBT1_2 on Bottom Layer "gnd1" (solid, remove dead copper, pour order 12): 131.318,24.892 131.318,109.601 202.438,109.601 202.438,24.892
NetC1_7 on Bottom Layer "NETC1_7_L02_P001" (solid, remove dead copper, pour order 1): 28.702,28.829 76.835,28.829 76.835,89.535 28.702,89.535
NetC15_1 on Top Layer "NETC15_1_L01_P010" (solid, remove dead copper, pour order 10): 133.985,140.462 133.985,225.171 168.402,225.171 168.402,140.335 168.275,140.462